# EAGLE board oven-controller-v2 (EAGLE 6.4)
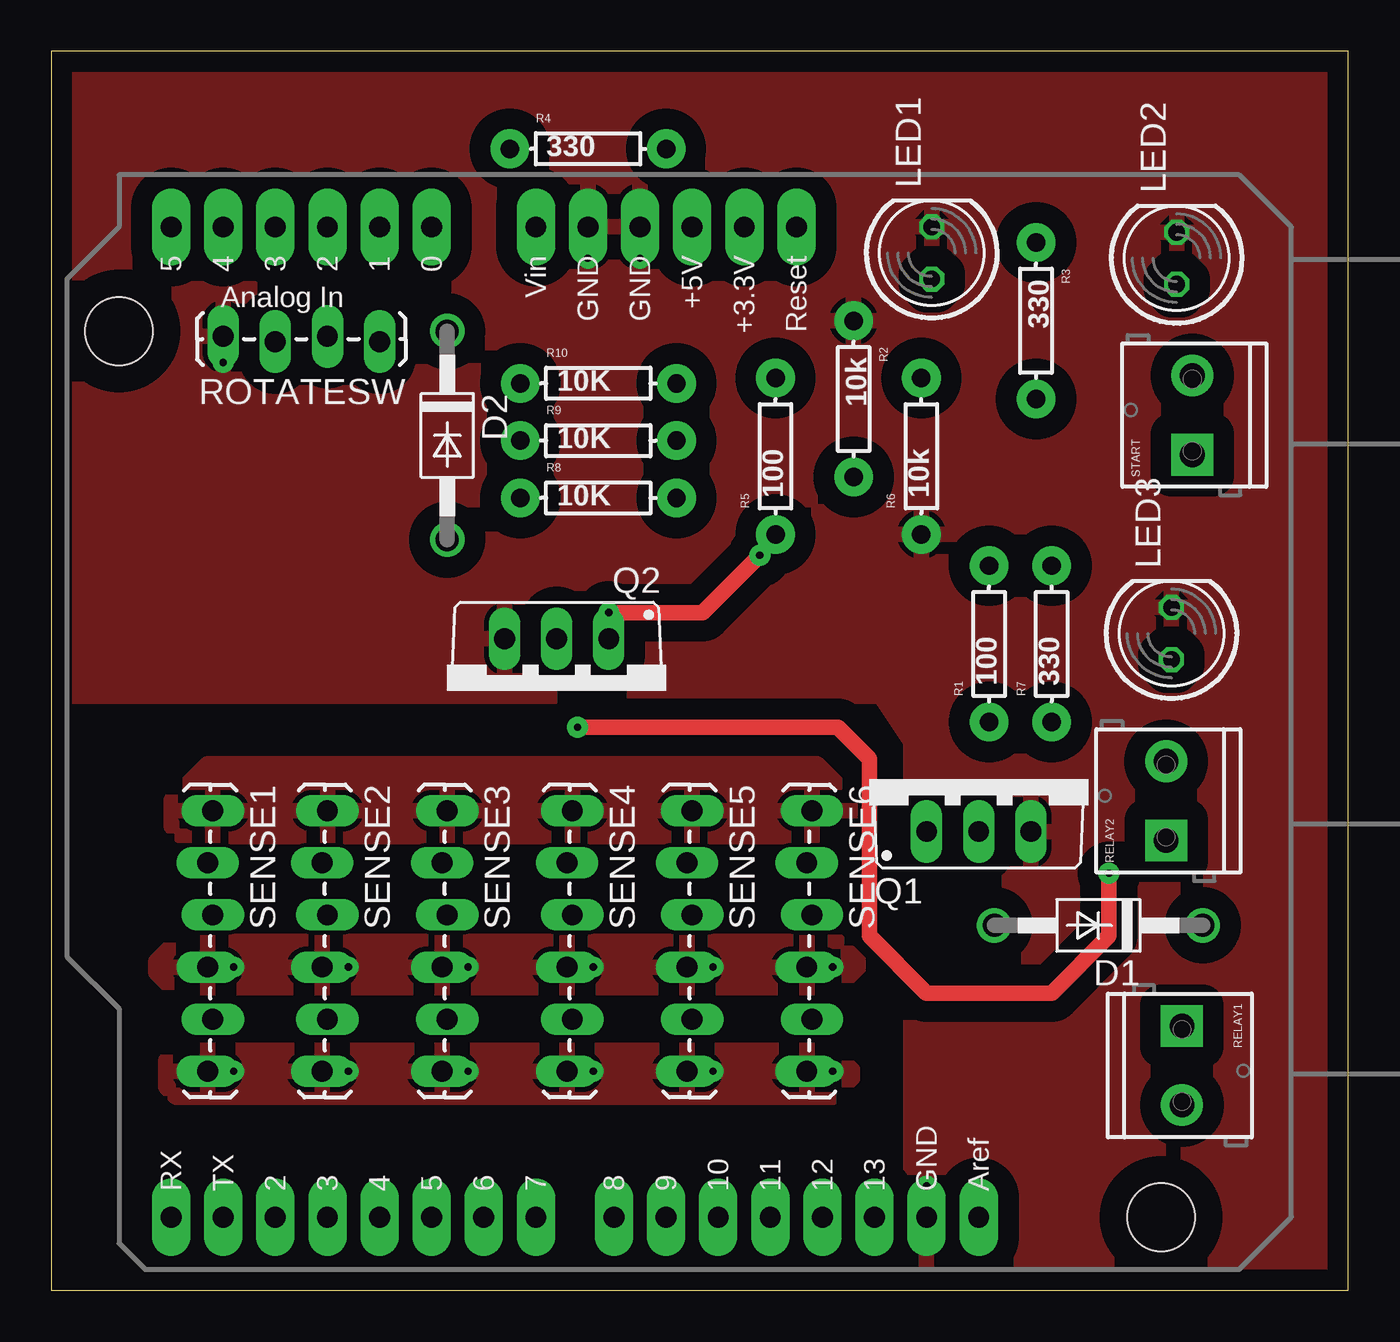
[diagram p0: board, top side]
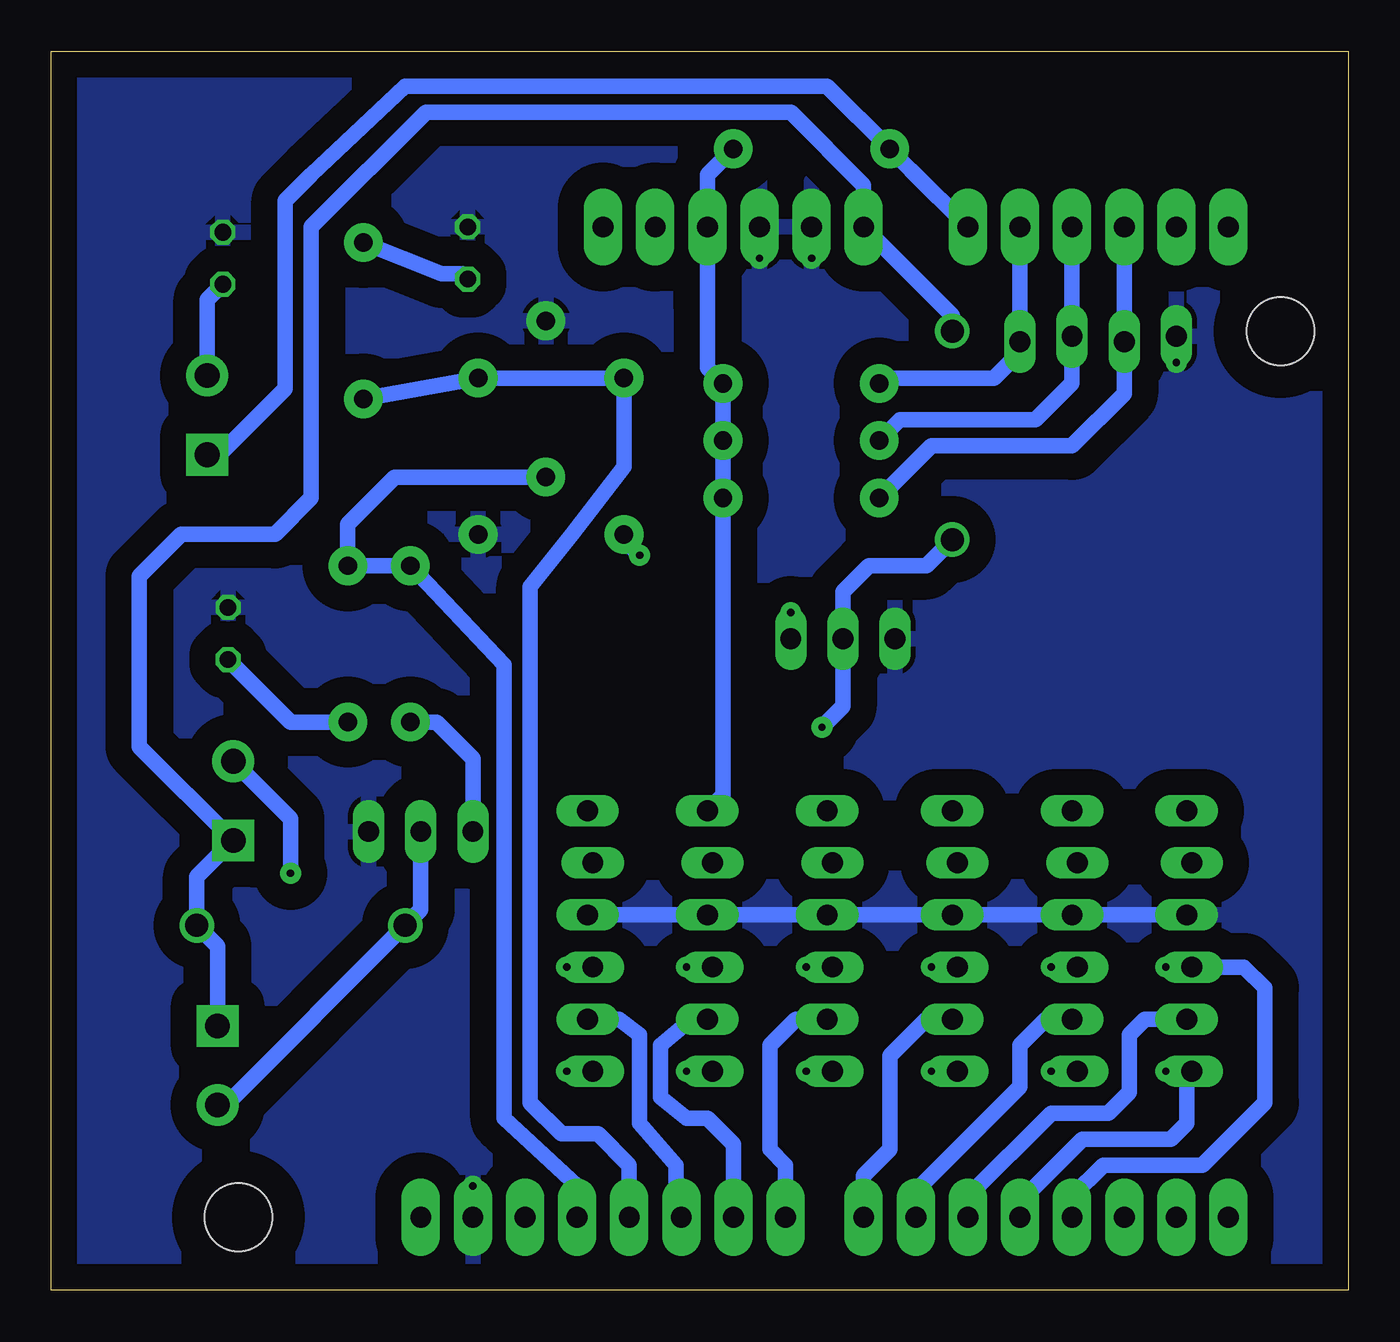
[diagram p1: board, bottom side, seen from below]

Size 63.23 x 60.38 mm. Coordinates in mm from the lower left corner, seen from the top.
Outline: 0,0 63.23,0 63.23,60.38 0,60.38 0,0
Copper layers (1*16): Top 0.0178mm / dielectric 59mil / Bottom 0.0178mm
Design rules "epl-lpkf": minimum track width 8mil, minimum drill 0.35mm, track to track 8mil, track to pad 8mil, pad to pad 8mil, via to via 8mil, smd to smd 8mil, copper to edge 15mil, drill to drill 15mil, minimum pad ring 8mil, minimum via ring 8mil, stop-mask expansion 3mil, vias tented up to drill 0mil, thermal gap 10mil

## Footprints (pad centres in the part's own frame; a part is rotated, then mirrored left to right if it is on the bottom)
DO41-10 = drill 1.118: A 5.08,0; C -5.08,0
LED5MM = drill 0.813 octagon: A -1.27,0; K 1.27,0
TO220BV = drill 1.016 long: D 0,-2.54; G -2.54,-2.54; S 2.54,-2.54
AXIAL-0.3 = drill 0.9 pad 1.88: P$1 -3.81,0; P$2 3.81,0
SCREWTERMINAL-3.5MM-2_LOCK = drill 1.2 pad 2.032 square: 1 -0.178,0 | drill 1.2 pad 2.032: 2 3.678,0
1X04_LOCK_LONGPADS = drill 1.016 long: 1 0,0; 2 2.54,-0.254; 3 5.08,0; 4 7.62,-0.254
1X06_LOCK_LONGPADS = drill 1.016 long: 1 0,0; 2 2.54,-0.254; 3 5.08,0; 4 7.62,-0.254; 5 10.16,0; 6 12.7,-0.254
DUEMILANOVE_SHIELD_LONGPADS = drill 1.016 pad 1.88 long: 3.3V 50.8,26.67; 5V 50.8,29.21; A0 50.8,41.91; A1 50.8,44.45; A2 50.8,46.99; A3 50.8,49.53; A4 50.8,52.07; A5 50.8,54.61; AREF 2.54,15.24; D2 2.54,49.53; D3 2.54,46.99; D4 2.54,44.45; D5 2.54,41.91; D6 2.54,39.37; D7 2.54,36.83; D8 2.54,33.02; D9 2.54,30.48; D10 2.54,27.94; D11 2.54,25.4; D12 2.54,22.86; D13 2.54,20.32; GND@0 50.8,31.75; GND@1 50.8,34.29; GND@2 2.54,17.78; RES 50.8,24.13; RX 2.54,54.61; TX 2.54,52.07; VIN 50.8,36.83 | hole 3.302: 45.72,57.15; 2.54,6.35

## Placement (x,y rotation side)
D1  1N4942  [DO41-10]  51.05,17.78 180 top
D2  1N4942  [DO41-10]  19.3,41.66 270 top
LED1  RED  [LED5MM]  42.93,50.55 90 top
LED2  RED  [LED5MM]  54.86,50.29 90 top
LED3  RED  [LED5MM]  54.61,32 90 top
Q1  IRFL310  [TO220BV]  45.21,24.89 0 top
Q2  IRFL310  [TO220BV]  24.64,29.21 180 top
R1  100  [AXIAL-0.3]  45.72,31.5 90 top
R2  10k  [AXIAL-0.3]  39.12,43.43 270 top
R3  330  [AXIAL-0.3]  48.01,47.24 270 top
R4  330  [AXIAL-0.3]  26.16,55.63 0 top
R5  100  [AXIAL-0.3]  35.31,40.64 90 top
R6  10k  [AXIAL-0.3]  42.42,40.64 90 top
R7  330  [AXIAL-0.3]  48.77,31.5 90 top
R8  10K  [AXIAL-0.3]  26.67,38.61 0 top
R9  10K  [AXIAL-0.3]  26.67,41.4 0 top
R10  10K  [AXIAL-0.3]  26.67,44.2 0 top
RELAY1  RL1  [SCREWTERMINAL-3.5MM-2_LOCK]  55.12,12.7 270 top
RELAY2  RL2  [SCREWTERMINAL-3.5MM-2_LOCK]  54.36,22.1 90 top
ROTATESW  SW  [1X04_LOCK_LONGPADS]  16,46.23 180 top
SENSE1  [1X06_LOCK_LONGPADS]  7.87,23.37 270 top
SENSE2  [1X06_LOCK_LONGPADS]  13.46,23.37 270 top
SENSE3  [1X06_LOCK_LONGPADS]  19.3,23.37 270 top
SENSE4  [1X06_LOCK_LONGPADS]  25.4,23.37 270 top
SENSE5  [1X06_LOCK_LONGPADS]  31.24,23.37 270 top
SENSE6  [1X06_LOCK_LONGPADS]  37.08,23.37 270 top
START  [SCREWTERMINAL-3.5MM-2_LOCK]  55.63,40.89 90 top
U1  ARDUINO_SHIELDLONGPADS  [DUEMILANOVE_SHIELD_LONGPADS]  60.45,1.02 90 top

## Library data of the parts
D1 D2 = diode
LED1-LED3 = led
Q1 Q2 = transistor-power
R1-R10 = SparkFun-Passives
RELAY1 RELAY2 ROTATESW SENSE1-SENSE6 START = SparkFun-Connectors
U1 = SparkFun-Boards

## Nets
5V: R4.P$2 R8.P$2 R9.P$2 R10.P$2 SENSE1.1 SENSE2.1 SENSE3.1 SENSE4.1 SENSE5.1 SENSE6.1 U1.5V
A0: R4.P$1 START.1 U1.A0
A1: R10.P$1 ROTATESW.1 U1.A1
A2: R9.P$1 ROTATESW.2 U1.A2
A3: R8.P$1 ROTATESW.3 U1.A3
CCO: SENSE1.4 SENSE2.4 SENSE3.4 SENSE4.4 SENSE5.4 SENSE6.4 U1.D3
CS_PIN5: SENSE1.5 U1.D5
CS_PIN6: SENSE2.5 U1.D6
CS_PIN7: SENSE3.5 U1.D7
CS_PIN8: SENSE4.5 U1.D8
CS_PIN9: SENSE5.5 U1.D9
CS_PIN10: SENSE6.5 U1.D10
CS_PIN11: R3.P$2 R5.P$2 R6.P$2 U1.D11
CS_PIN12: R1.P$2 R2.P$2 R7.P$2 U1.D12
GND: LED1.K LED2.K LED3.K Q1.S Q2.S R2.P$1 R6.P$1 ROTATESW.4 SENSE1.3 SENSE2.3 SENSE3.3 SENSE4.3 SENSE5.3 SENSE6.3 U1.GND@0 U1.GND@1 U1.GND@2
N$1: Q2.G R5.P$1
N$2: Q1.G R1.P$1
N$3: D1.A Q1.D RELAY1.2
N$4: D2.A Q2.D RELAY2.2
N$7: LED1.A R3.P$1
N$9: LED3.A R7.P$1
N$10: LED2.A START.2
SCLK_PIN4: SENSE1.6 SENSE2.6 SENSE3.6 SENSE4.6 SENSE5.6 SENSE6.6 U1.D4
VIN: D1.C D2.C RELAY1.1 RELAY2.1 U1.VIN

## Tracks (layer width: path | path; a pad name or v marks a point on that pad's centre or on a via)
5V
  Bottom 0.762: SENSE5.1 30.48,24.13 R8.P$2 R9.P$2 R10.P$2 31.24,44.96 31.24,48.01 U1.5V 31.24,54.36 R4.P$2
  pour Top: 5.84,23.88 6.6,24.64 7.62,25.65 37.34,25.65 39.12,23.88 39.12,23.11 38.1,22.1 6.35,22.1 5.84,22.61
A0
  Bottom 0.762: 18.54,51.56 U1.A0 21.34,54.61 R4.P$1 25.4,58.67 45.97,58.67 50.55,54.36 51.82,53.09 51.82,43.94 55.04,40.72 START.1
A1
  Bottom 0.762: U1.A1 ROTATESW.1 16,45.72 17.27,44.45 22.61,44.45 R10.P$1
A2
  Bottom 0.762: U1.A2 ROTATESW.2 13.46,44.2 15.24,42.42 21.84,42.42 R9.P$1
A3
  Bottom 0.762: U1.A3 ROTATESW.3 10.92,43.69 13.46,41.15 20.32,41.15 R8.P$1
CCO  (via drill 0.36 pad 1.02)
  Bottom 0.762: U1.D3 13.46,4.57 11.94,6.1 7.11,6.1 4.06,9.14 4.06,14.73 5.08,15.75 SENSE1.4
  other vias: 8.89,15.75 14.48,15.75 20.32,15.75 26.42,15.75 32.26,15.75 38.1,15.75
  pour Top: 6.6,16.76 5.84,16.76 5.08,16 5.08,15.49 5.84,14.73 38.35,14.73 39.37,15.75 39.37,16 38.35,17.02 6.86,17.02
CS_PIN5
  Bottom 0.762: SENSE1.5 9.91,13.21 10.67,12.45 10.67,9.65 11.43,8.89 11.68,8.64 14.48,8.64 18.54,4.57 U1.D5
CS_PIN6
  Bottom 0.762: SENSE2.5 14.73,13.21 16,11.94 16,9.91 20.83,5.08 21.08,4.83 U1.D6
CS_PIN7
  Bottom 0.762: SENSE3.5 20.57,13.21 22.35,11.43 22.35,6.86 23.62,5.59 U1.D7
CS_PIN8
  Bottom 0.762: SENSE4.5 26.92,13.21 28.19,11.94 28.19,6.86 27.43,6.1 U1.D8
CS_PIN9
  Bottom 0.762: SENSE5.5 32,13.21 33.53,11.94 33.53,9.4 32.26,8.38 31.24,8.38 29.97,7.11 U1.D9
CS_PIN10
  Bottom 0.762: SENSE6.5 35.56,13.21 34.54,12.45 34.54,8.13 32.77,6.1 32.77,3.81 U1.D10
CS_PIN11
  Bottom 0.762: R3.P$2 R6.P$2 R5.P$2 35.31,40.13 37.85,36.83 39.88,34.29 39.88,9.14 38.35,7.62 36.58,7.62 35.05,6.1 U1.D11
CS_PIN12
  Bottom 0.762: R2.P$2 46.48,39.62 48.77,37.34 R7.P$2 R1.P$2 41.15,30.48 41.15,8.38 37.59,5.08 U1.D12
GND  (via drill 0.36 pad 1.02)
  Bottom 0.762: SENSE1.3 SENSE2.3 SENSE3.3 SENSE4.3 SENSE5.3 SENSE6.3
  other vias: 28.7,50.29 26.16,50.29 8.38,45.21 42.67,5.08
  pour Bottom (isolate 1.27): -1.27,56.9 -1.27,-1.27 65.02,-1.27 64.52,61.47 -1.52,61.47
  pour Top (isolate 1.016): -1.52,61.72 -1.02,28.96 40.39,28.96 41.91,26.67 41.91,-0.25 65.02,-0.51 65.53,2.29 65.28,28.96 64.77,61.72
N$1  (via drill 0.36 pad 1.02)
  Top 0.762: v27.18,33.02 31.75,33.02 v34.54,35.81
  Bottom 0.762: Q2.G v27.18,33.02 | R5.P$1 35.31,36.58 v34.54,35.81
N$2
  Bottom 0.762: R1.P$1 44.45,27.69 42.67,25.91 Q1.G
N$3
  Bottom 0.762: RELAY1.2 54.73,9.02 D1.A 45.21,18.54 Q1.D
N$4  (via drill 0.36 pad 1.02)
  Top 0.762: v25.65,27.43 38.35,27.43 39.88,25.91 39.88,17.27 42.67,14.48 48.77,14.48 51.56,17.27 v51.56,20.32
  Bottom 0.762: D2.A 20.57,35.31 23.37,35.31 24.64,34.04 Q2.D 24.64,28.45 v25.65,27.43 | v51.56,20.32 51.56,22.98 RELAY2.2
N$7
  Bottom 0.762: R3.P$1 44.2,49.53 43.18,49.53 LED1.A
N$9
  Bottom 0.762: R7.P$1 51.56,27.69 LED3.A
N$10
  Bottom 0.762: START.2 55.63,48.26 LED2.A
SCLK_PIN4  (via drill 0.36 pad 1.02)
  Bottom 0.762: U1.D4 16,4.32 12.95,7.37 8.64,7.37 7.87,8.13 7.87,10.41 SENSE1.6
  other vias: 8.89,10.67 14.48,10.67 20.32,10.67 26.42,10.67 32.26,10.67 38.1,10.67
  pour Top: 38.35,11.43 39.12,10.67 39.12,10.41 38.1,9.4 6.1,9.4 5.59,9.91 5.59,11.18 6.1,11.68 37.85,11.68 38.35,11.18
VIN
  Bottom 0.762: RELAY1.1 55.12,16.76 D1.C 56.13,20.14 RELAY2.1 58.93,26.49 58.93,34.8 56.9,36.83 52.32,36.83 50.55,38.61 50.55,51.82 44.96,57.4 27.18,57.4 23.62,53.85 U1.VIN 19.3,47.5 D2.C